# Altium PCB PCB1.PcbDoc (part 2 of 2)
Units mm, origin at the board's own origin, x right, y up, seen from the top; angles counter-clockwise.
Board outline 61.72 x 101.6 mm, 2 copper layers (Top Layer, Bottom Layer); 108 components, 60 nets, 357 pads, 84 vias.
Unrouted connection lines stored in the file: 20.
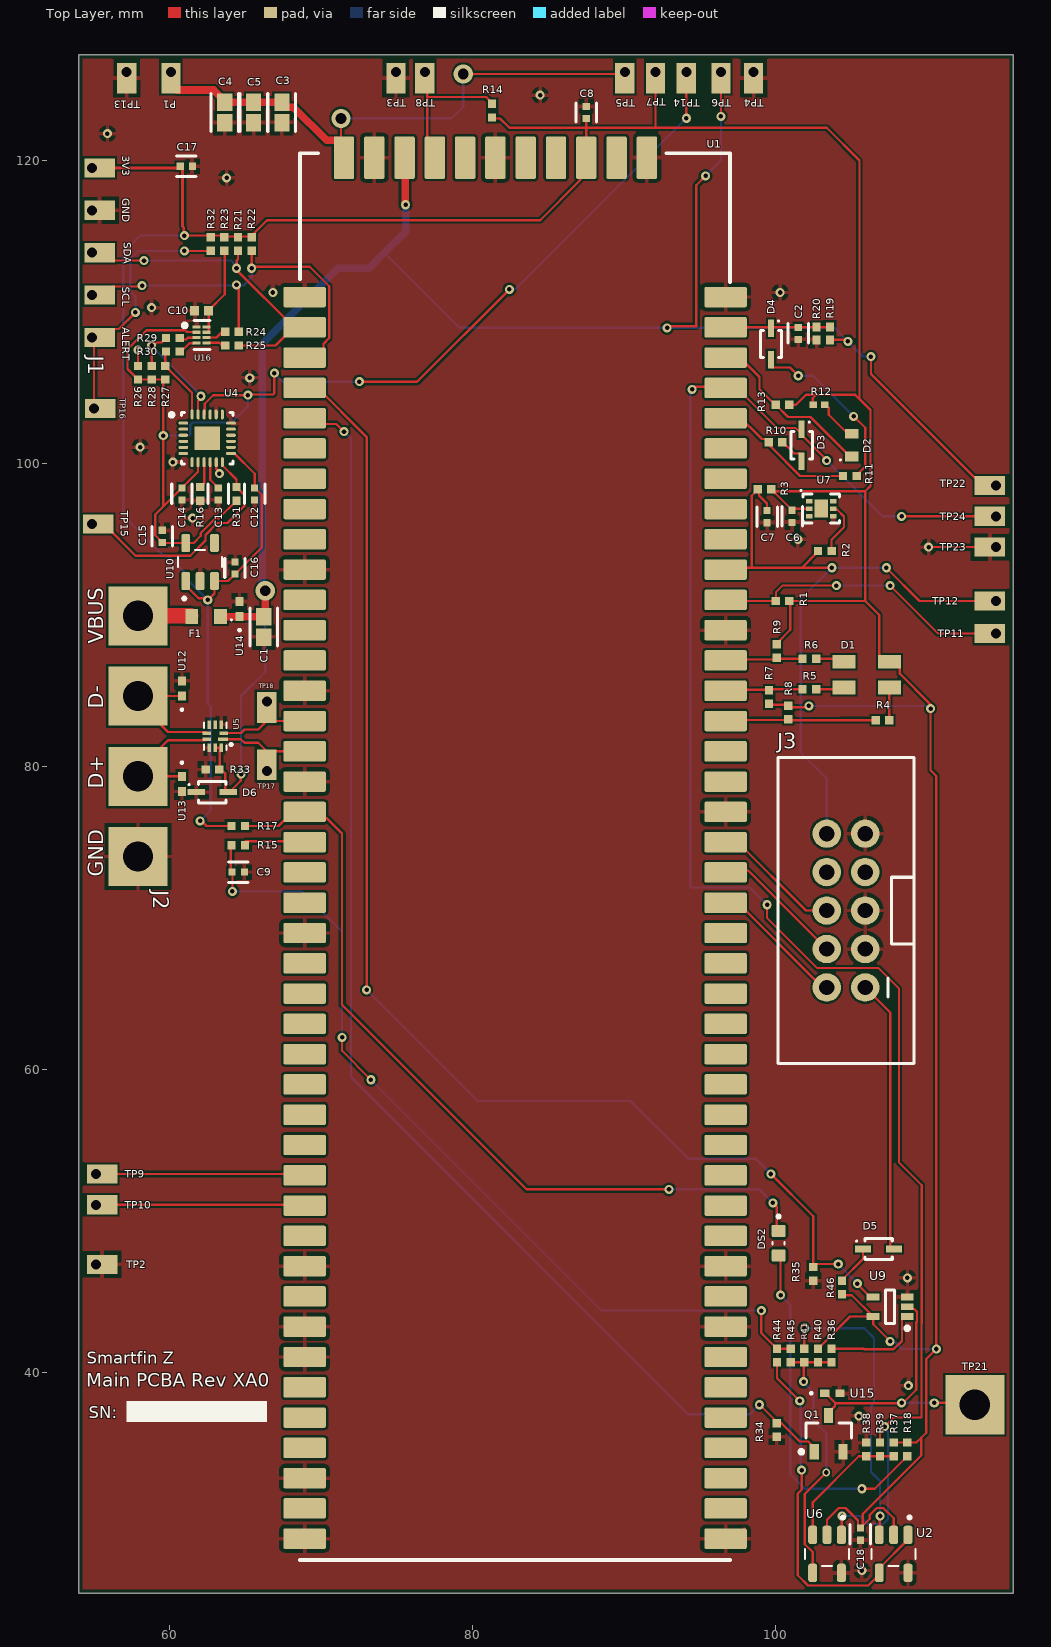
[diagram p0: Top Layer view]

## Via types
v1: diameter 0.6, hole 0.3, Top Layer to Bottom Layer, 80 vias
v2: diameter 1.27, hole 0.711, Top Layer to Bottom Layer, 3 vias
v3: diameter 0.5, hole 0.3, Top Layer to Bottom Layer, 1 vias

## Nets (pads, with @x,y where several pads share a name; then routed paths per layer and width w, separated by ;. In a path a pad name is that pad's centre, name@x,y a point inside that pad or via, vN(x,y) a via of type N, cw(c..) or ccw(c..) an arc to the next point about the centre after c; other vN are vias at no path point) (continued)
WATER_EN: (continued)
  Bottom Layer w0.15: v1(72.994,65.247) 76.608,61.632 80.329,57.912 90.424,57.912 94.234,54.102 98.679,54.102 v1(99.695,53.086) ; v1(104.139,47.137) 104.139,47.127 105.41,45.857 v1(105.41,45.847)
WATER_MFG_TEST_EN: Q1.1 R34.2 U1.58 | length 87
  Top Layer w0.15: U1.58@68.847,103.125 69.57,103.125 70.079,102.616 70.993,102.616 v1(71.501,102.108) ; v1(98.933,37.846) 98.96,37.846 99.976,36.83 R34.2@100.076,36.83 ; R34.2@100.203,36.83 101.606,35.427 102.164,35.427 102.489,35.102 Q1.1@102.489,35.052
  Bottom Layer w0.15: v1(71.501,102.108) 71.956,101.653 71.956,59.489 94.234,37.211 98.298,37.211 v1(98.933,37.846)
WKP: R10.2 R11.2 U1.38 | length 9.6
  Top Layer w0.15: U1.38@96.7,103.3 97.425,103.3 99.1,101.625 99.325,101.625 99.5,101.45 99.5,101.4 99.675,101.225 99.675,101.122 101.61,99.187 104.402,99.187 R11.2@104.457,99.187
pads on no net: J3.KEY J3.TDI U1.2 U1.3 U1.4 U1.5 U1.6 U1.7 U1.11 U1.12 U1.13 U1.14 U1.15 U1.16 U1.17 U1.26 U1.27 U1.46 U1.47 U1.49 U1.64 U1.65 U1.66 U1.73 U1.74 U1.85 U1.87 U1.90 U1.91 U1.92 U1.94 U4.1 U4.2 U4.3 U4.4 U4.5 U4.6 U4.7 U4.14 U4.15 U4.16 U4.17 U4.19 U4.21 U4.25 U5.4 U5.5 U7.1 U7.3 U7.6 U7.7 U10.4

## Polygon pours and split planes (outlines as drawn)
GND on Bottom Layer "GND" (solid, remove dead copper, pour order 44): 52.451,128.397 52.451,21.209 118.745,21.209 119.507,21.971 118.11,23.368 118.11,128.143
GND on Top Layer "GND" (solid, remove dead copper, pour order 45): 50.971,128.956 50.971,23.292 51.86,22.403 123.742,22.403 123.742,125.273 120.059,128.956

## Silkscreen, mask and mechanical layers (free items; w line width, h text height)
Top Overlay:
  rectangle: 57.15,36.703 66.421,38.1
  text "3V3" at 56.842,120.323 h0.51 r270
  text "GND" at 56.842,117.529 h0.51 r270
  text "SDA" at 56.969,114.608 h0.51 r270
  text "SCL" at 56.842,111.687 h0.51 r270
  text "ALERT" at 56.842,109.02 h0.51 r270
  text "Smartfin Z" at 54.51,40.54 h0.8
  text "Main PCBA Rev XA0" at 54.483,38.735 h1.52
  text "SN:" at 54.637,36.968 h0.8

## Text inside footprints (layer, text, board x,y; h text height)
J2: Top Overlay "VBUS" at 55.6,88.117 h1 r90; Top Overlay "D+" at 55.6,78.517 h1 r90; Top Overlay "D-" at 55.6,83.817 h1 r90; Top Overlay "GND" at 55.6,72.717 h1 r90